# EAGLE board espiotv1 (EAGLE 7.6.0)
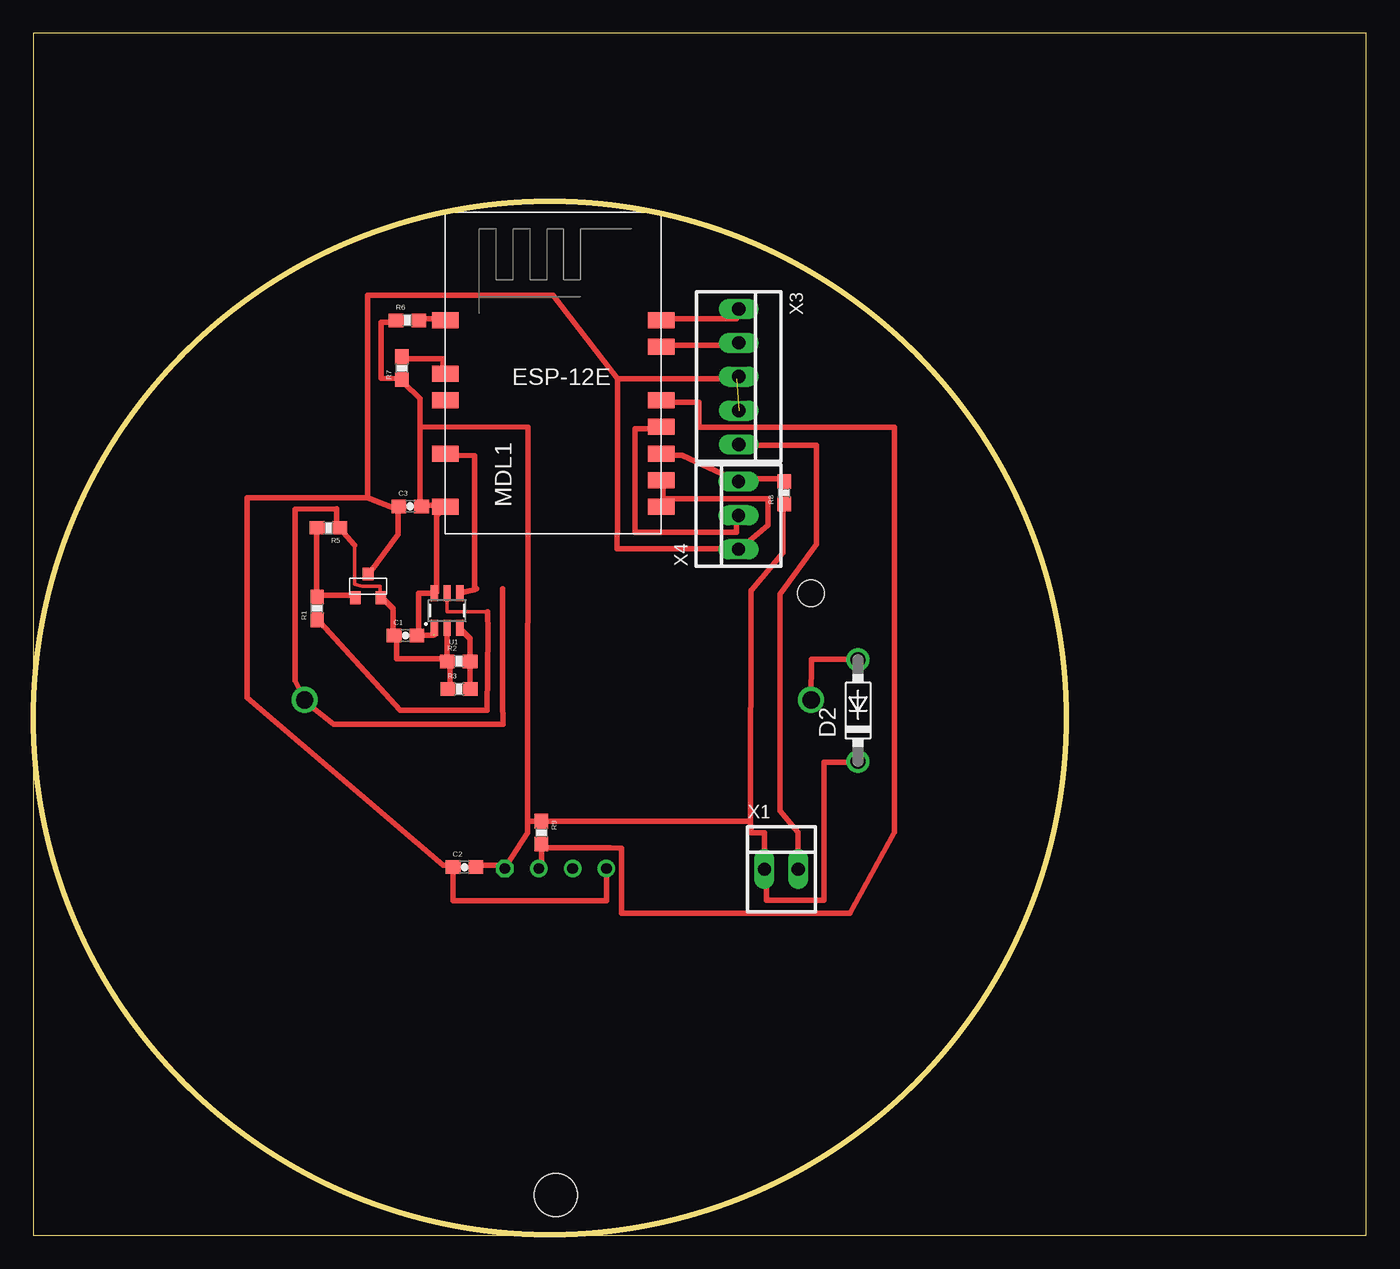
[diagram p0: board, top side]
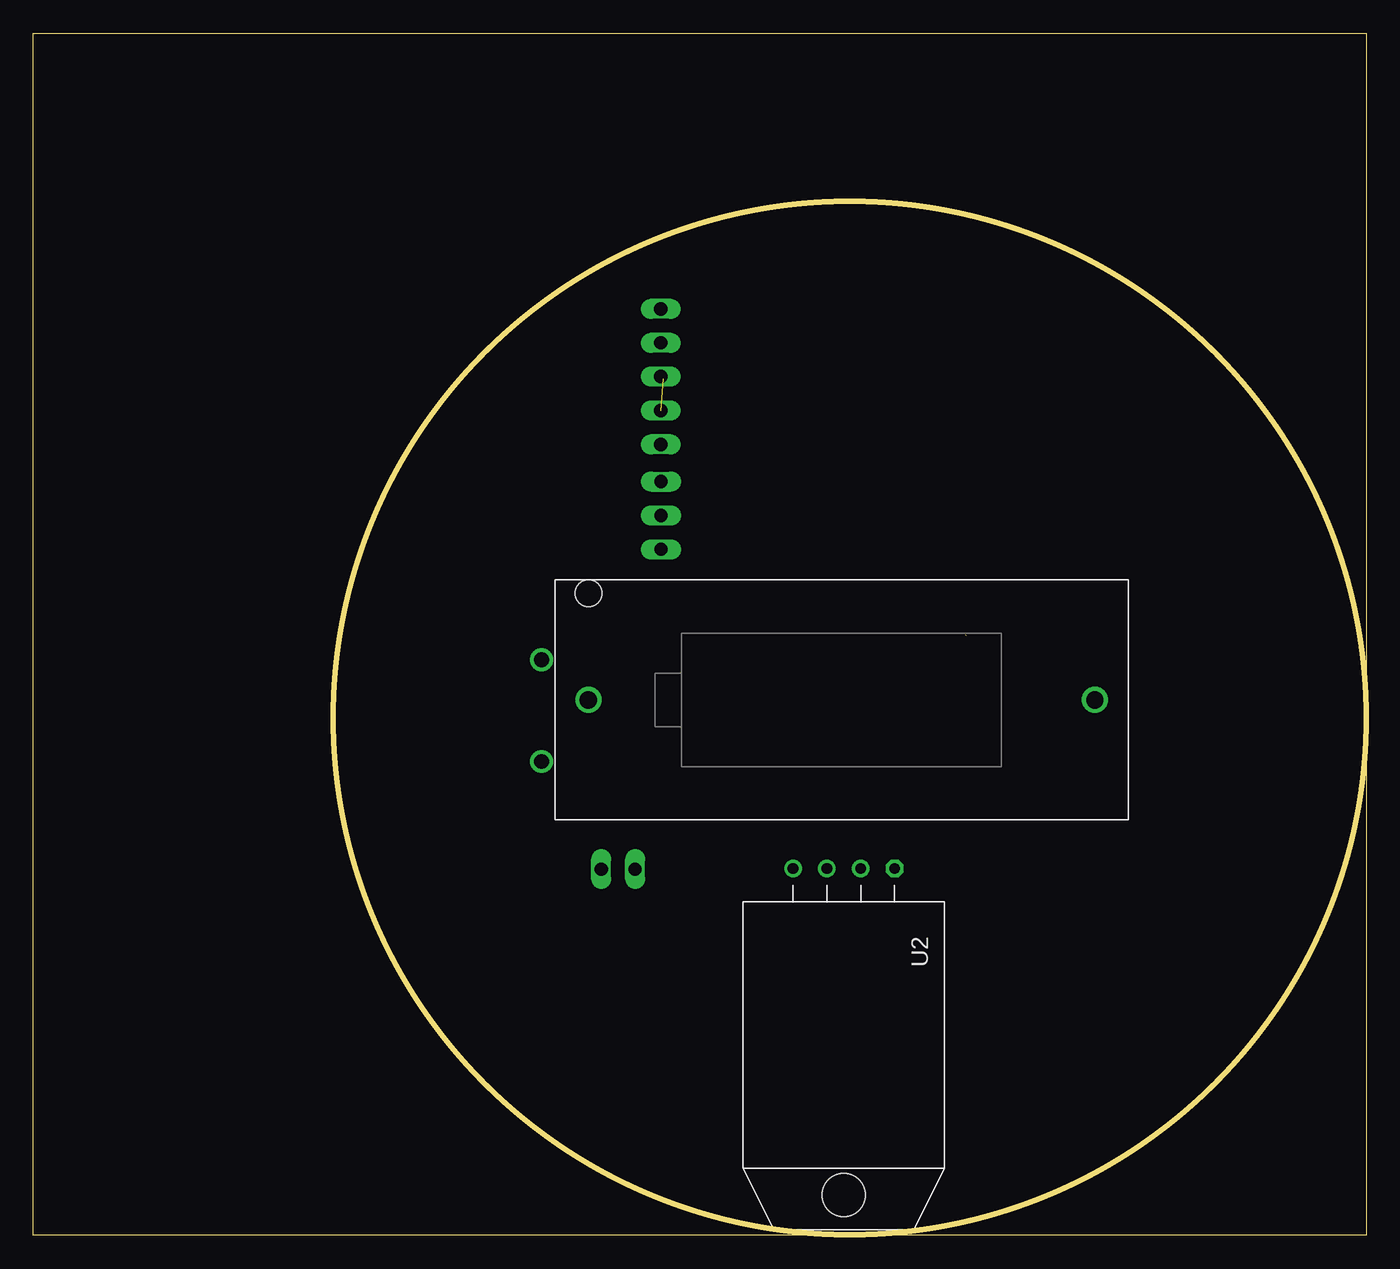
[diagram p1: board, bottom side, seen from below]

Size 100 x 90.16 mm. Coordinates in mm from the lower left corner, seen from the top.
Outline: 0,0 100,0 100,90.16 0,90.16 0,0
Copper layers (1*16): Top 0.035mm / dielectric 1.5mm / Bottom 0.035mm
Design rules "default": minimum track width 10mil, minimum drill 24mil, track to track 8mil, track to pad 8mil, pad to pad 8mil, via to via 8mil, smd to smd 8mil, copper to edge 40mil, drill to drill 8mil, minimum pad ring 10mil, minimum via ring 8mil, stop-mask expansion 4mil, vias tented up to drill 0mil, thermal gap 10mil
Milling: area 0,0.1 to 77.5,77.6

## Footprints (pad centres in the part's own frame; a part is rotated, then mirrored left to right if it is on the bottom)
0603-CAP = smd 1.1 x 1: 1 -0.85,0; 2 0.85,0
DO41-7.6 = drill 1.1 pad 1.7: A 3.81,0; C -3.81,0
ESP8266-ESP12E = smd 2 x 1.2: 1 0,16; 3 0,12; 4 0,10; 6 0,6; 8 0,2; 9 16.2,2; 10 16.2,4; 11 16.2,6; 12 16.2,8; 13 16.2,10; 15 16.2,14; 16 16.2,16
0603-RES = smd 1.1 x 1: 1 -0.85,0; 2 0.85,0
SOT23-6 = smd 0.55 x 1.2: 1 0.95,1.3; 2 0,1.3; 3 -0.95,1.3; 4 -0.95,-1.3; 5 0,-1.3; 6 0.95,-1.3
RHT03_DHT-22/RA = drill 0.8: DATA -1.27,0; GND 3.81,0; NULL 1.27,0 | drill 0.8 octagon: VDD -3.81,0 | hole 3.25: 0,24.5
KEYSTONE-2/3A = drill 1.3: +VE 0,19; -VE 0,-19 | hole 2: 8,19
IRLML2502 = smd 0.802 x 0.972: D 0,1; G -0.95,-0.77; S 0.95,-0.77
22-23-2021 = drill 1 long: 1 -1.27,0; 2 1.27,0
22-23-2051 = drill 1 long: 1 -5.08,0; 2 -2.54,0; 3 0,0; 4 2.54,0; 5 5.08,0
22-23-2031 = drill 1 long: 1 -2.54,0; 2 0,0; 3 2.54,0

## Placement (x,y rotation side)
C1  [0603-CAP]  27.91,45 0 top
C2  [0603-CAP]  32.34,27.62 0 top
C3  [0603-CAP]  28.28,54.68 0 top
D2  1N5817-T  [DO41-7.6]  61.87,39.37 90 top
MDL1  [ESP8266-ESP12E]  30.91,52.64 0 top
R1  [0603-RES]  21.29,47.03 90 top
R2  [0603-RES]  31.92,43.06 0 top
R3  [0603-RES]  31.95,40.98 0 top
R5  [0603-RES]  22.14,53.08 180 top
R6  [0603-RES]  28.06,68.63 0 top
R7  [0603-RES]  27.66,65.06 90 top
R8  [0603-RES]  56.33,55.7 90 top
R9  [0603-RES]  38.12,30.21 270 top
U1  TPL5111  [SOT23-6]  31.04,46.86 180 top
U2  [RHT03_DHT-22/RA]  39.19,27.53 180 bottom
U$1  BATT-CR123A  [KEYSTONE-2/3A]  39.35,40.17 90 bottom
U$3  IRLML2502  [IRLML2502]  25.12,48.61 0 top
X1  22-23-2021  [22-23-2021]  56.13,27.47 0 top
X3  22-23-2051  [22-23-2051]  52.93,64.41 270 top
X4  22-23-2031  [22-23-2031]  52.9,54 90 top

## Library data of the parts
C1-C3 R1-R3 R5-R9 = SparkFun
D2 = diode
MDL1 = ESP-12E (2)
U1 = TPL5111; PROD_ID: TPL5111
U2 = dht-22; PROD_ID: SEN-10167
U$1 = battery-3
U$3 = IRLML2502
X1 = con-molex; MF: MOLEX; MPN: 22-23-2021; OC_FARNELL: 1462926; OC_NEWARK: 25C3832
X3 = con-molex; MF: MOLEX; MPN: 22-23-2051; OC_FARNELL: 1462952; OC_NEWARK: 38C9178
X4 = con-molex; MF: MOLEX; MPN: 22-23-2031; OC_FARNELL: 1462950; OC_NEWARK: 30C0862

## Nets
GND: C1.1 R2.1 R3.1 R5.1 U1.2 U$1.-VE U$3.S
GNDMOS: C2.1 C3.1 MDL1.9 MDL1.10 U2.GND U$3.D X3.3 X3.4 X4.1
N$1: D2.A U$1.+VE
N$2: C1.2 C2.2 C3.2 D2.C MDL1.8 R6.1 R7.1 R8.1 R9.1 U1.1 U1.6 U2.VDD X1.1
N$3: R2.2 R3.2 U1.3
N$4: R1.1 U1.5
N$5: R1.2 R5.2 U$3.G
N$6: MDL1.6 U1.4
N$7: MDL1.16 X3.1
N$8: MDL1.15 X3.2
N$9: MDL1.1 R6.2
N$10: MDL1.3 R7.2
N$11: MDL1.13 R9.2 U2.DATA
N$12: X1.2 X3.5
N$13: MDL1.11 R8.2 X4.3
N$14: MDL1.12 X4.2

## Tracks (layer width: path | path; a pad name or v marks a point on that pad's centre or on a via)
GND
  Top 0.254: 24.09,51.77 24.09,48.82 24.67,48.7 26,48.7 26,48
  Top 0.406: R3.1 31.25,41 31.25,43 R2.1 31.03,43.25 | 31.03,43.25 31.25,43.24 27.25,43.24 27.25,44.75 C1.1 27,45 27,47 26.25,47.75 U$3.S 26,48 | 31.03,43.25 31.03,45.5 U1.2 | 24.09,51.77 23,53 R5.1 22.75,53.25 22.74,54.49 19.65,54.48 19.65,41.59 U$1.-VE 20.5,40 20.56,39.9 22.52,38.35 35.23,38.36 35.2,40.09 35.21,48.5
GNDMOS  (1 unrouted)
  Top 0.406: 47.25,55.25 47.25,56.5 MDL1.10 | 47.25,55.25 47.25,54.75 MDL1.9 | 47.25,55.25 55.11,55.25 55.11,53.25 53,51.5 X4.1 52.75,51.5 43.81,51.49 43.83,53.62 43.83,64.25 | 43.83,64.25 52.75,64.25 X3.3 | 27.37,54.44 27.37,52.61 25.25,49.75 U$3.D | U2.GND 43,27.5 43,25.1 31.51,25.1 31.5,27.5 C2.1 31.25,27.75 30.75,27.75 16.04,40.33 16.04,55.33 25.06,55.33 | 25.06,55.33 27.37,54.44 | 27.37,54.44 C3.1 | 43.83,64.25 39,70.5 25.06,70.52 25.06,55.33
N$1
  Top 0.406: U$1.+VE 58.36,43.2 61.11,43.2 61.11,43.18 D2.A
N$2  (1 unrouted)
  Top 0.406: R6.1 27,68.5 26.1,68.49 26.1,64.29 27.5,64.25 R7.1 27.75,64 29,62.75 29,60.64 | 30,45.5 30,45 29,45 C1.2 | U1.1 30.09,45.06 30.07,45.04 28.91,45.03 28.91,48.16 U1.6 30.25,48.25 30.25,54 30.75,54.5 MDL1.8 30.75,54.75 29.25,54.75 C3.2 29,54.75 29,60.64 | C2.2 33.25,27.75 35.25,27.75 U2.VDD 35.5,27.75 37.09,30.22 37.09,31.26 | 53.82,30.86 53.85,30.19 54.85,30.2 54.86,27.5 X1.1 55,27.25 55,25.13 59.32,25.13 59.33,28.89 59.33,35.49 61.38,35.48 | 53.82,30.86 53.84,48.35 53.88,48.39 56.25,51.21 56.25,54.75 R8.1 | 61.38,35.48 61.91,35.48 | 29,60.64 37.1,60.63 37.09,31.26 | 37.09,31.26 37.09,31.06 R9.1 53.82,31.06 53.82,30.86 | D2.C 61.38,35.56 61.38,35.48
N$3
  Top 0.406: R3.2 32.75,41 32.75,43 R2.2 32.75,43.25 32.75,44.75 32,45.5 U1.3
N$4
  Top 0.254: 34.07,46.78 31.06,46.78 31.06,47.78
  Top 0.406: 34.07,46.78 34.1,45.21 34.05,39.38 27.5,39.38 21.5,46 R1.1 | 31.06,47.78 U1.5
N$5
  Top 0.406: U$3.G 24,48 21.5,48 R1.2 21.25,48 21.25,53 R5.2
N$6
  Top 0.406: 33.11,48.41 31.99,48.2 32,48.25 U1.4 33.11,48.41 | 33.11,48.41 33.25,48.5 | 33.11,48.41 33.11,58.48 31,58.5 MDL1.6
N$7
  Top 0.406: MDL1.16 47.25,68.75 52.75,68.75 52.75,69.25 X3.1
N$8
  Top 0.406: MDL1.15 47.25,66.75 52.75,66.75 X3.2
N$9
  Top 0.406: R6.2 29,68.75 30.75,68.75 MDL1.1
N$10
  Top 0.406: R7.2 27.75,65.75 30.75,65.75 30.75,64.75 MDL1.3
N$11
  Top 0.406: MDL1.13 47.25,62.5 49.94,62.5 49.94,60.61 52,60.61 64.59,60.61 64.59,30.25 61.26,24.17 44.14,24.17 44.14,29.06 43.25,29.06 38.12,29.06 R9.2 38.12,27.53 U2.DATA 38,27.75
N$12
  Top 0.406: X3.5 53,59.25 58.76,59.25 58.76,51.85 56,48.09 56,31.86 57.36,30.24 X1.2
N$13
  Top 0.406: R8.2 56.25,56.75 53,56.75 X4.3 52.75,56.75 52.65,56.68 48.68,58.5 47.25,58.5 MDL1.11
N$14
  Top 0.406: MDL1.12 47,60.5 45.16,60.5 45.16,53.49 45.16,52.74 52.75,52.74 52.75,54 X4.2